# Altium PCB atmega+can.PcbDoc
Units mil, origin at the board's own origin, x right, y up, seen from the top; angles counter-clockwise.
Board outline 2700 x 3400 mil, 2 copper layers (Top Layer, Bottom Layer); 34 components, 37 nets, 143 pads, 15 vias.
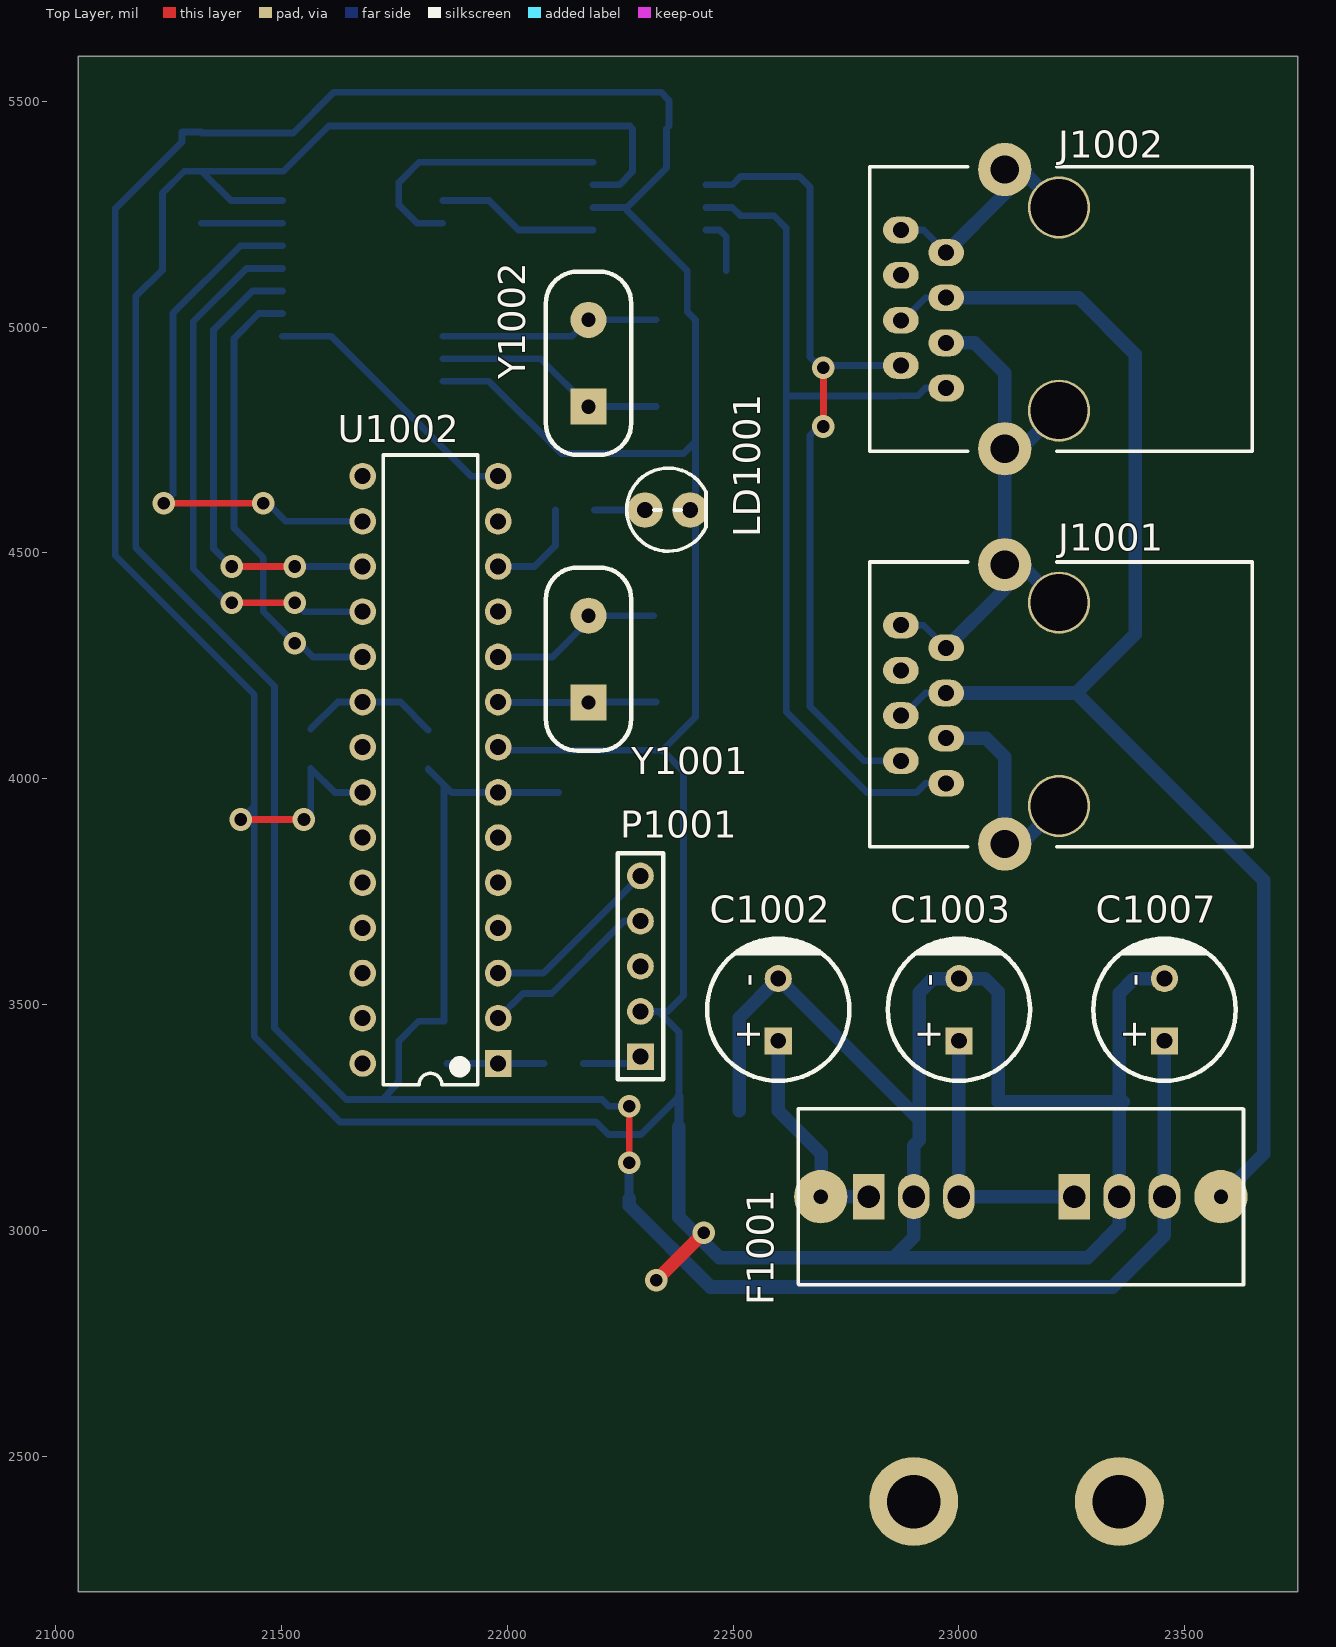
[diagram p0: Top Layer view]
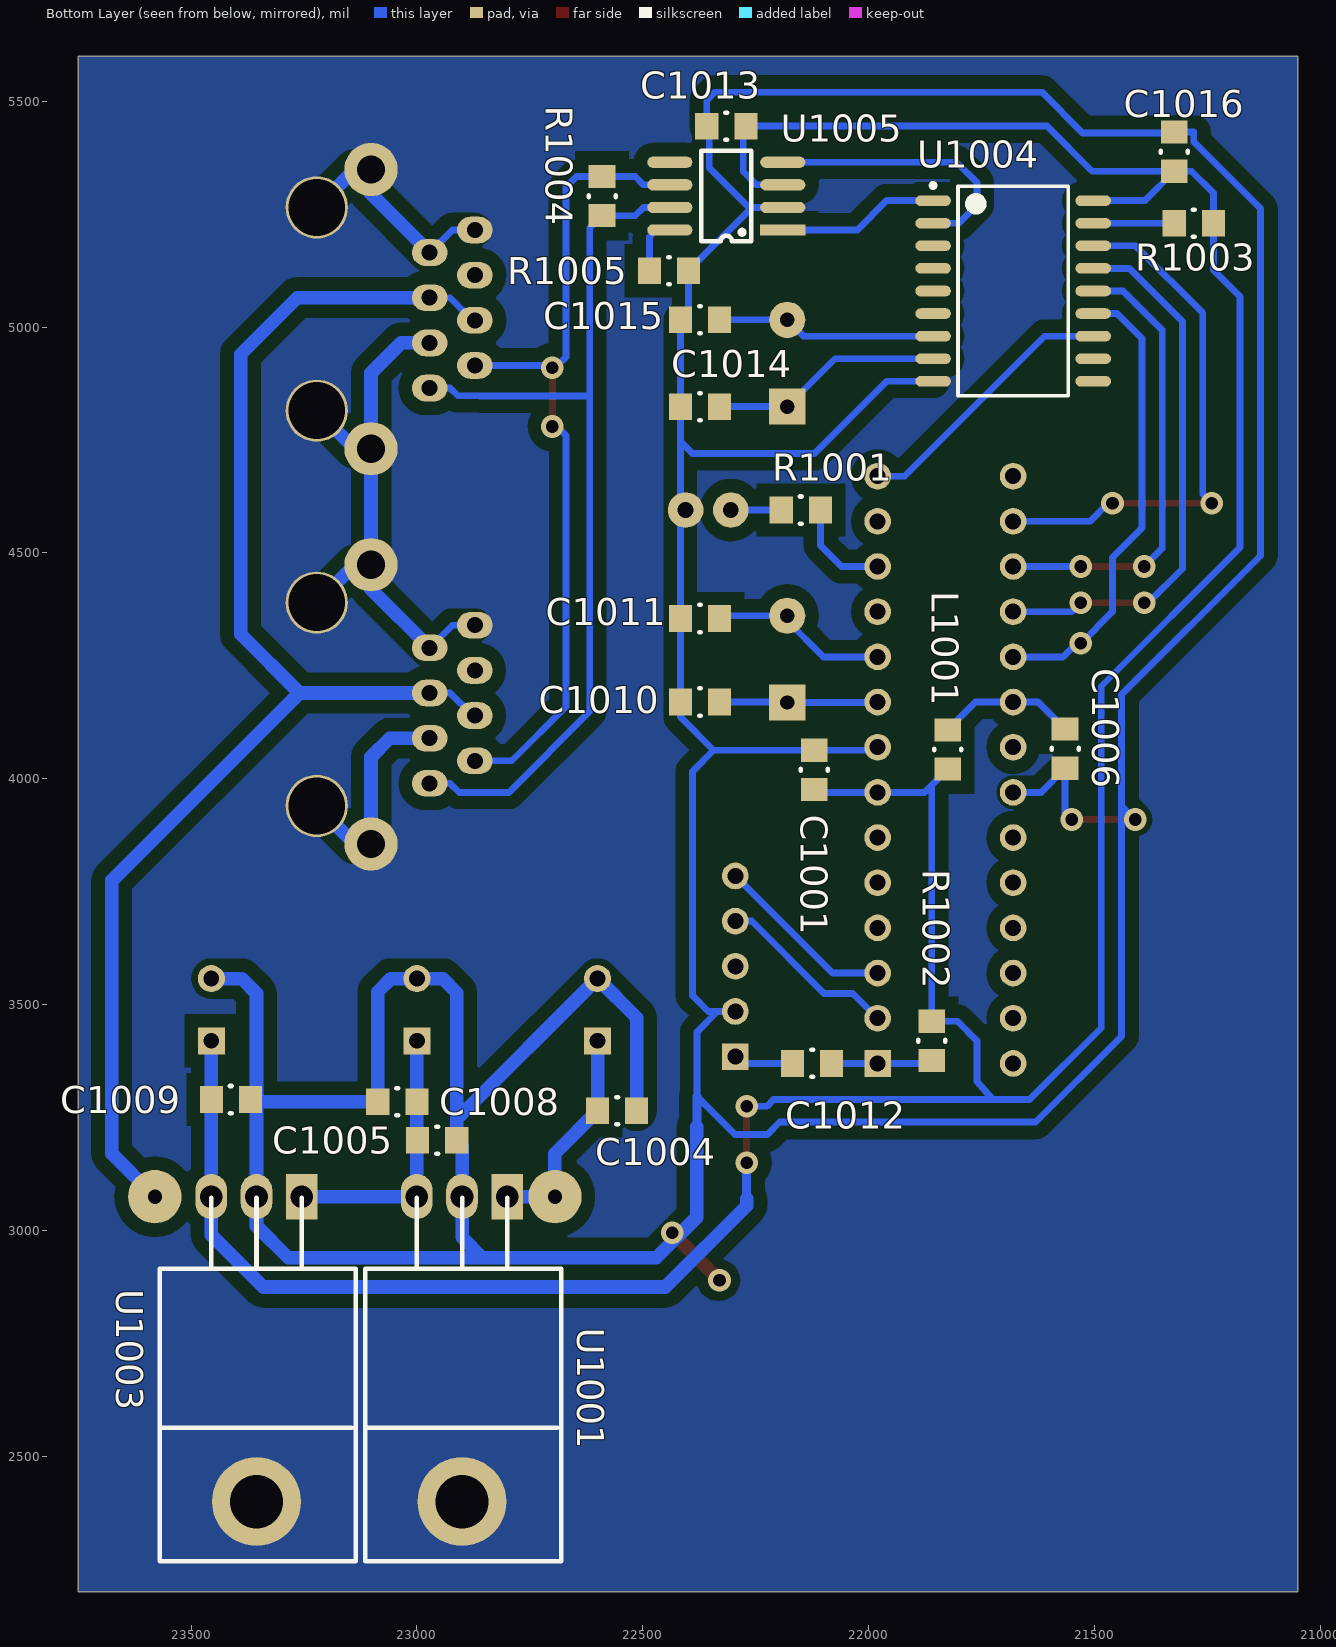
[diagram p1: Bottom Layer view, seen from below]
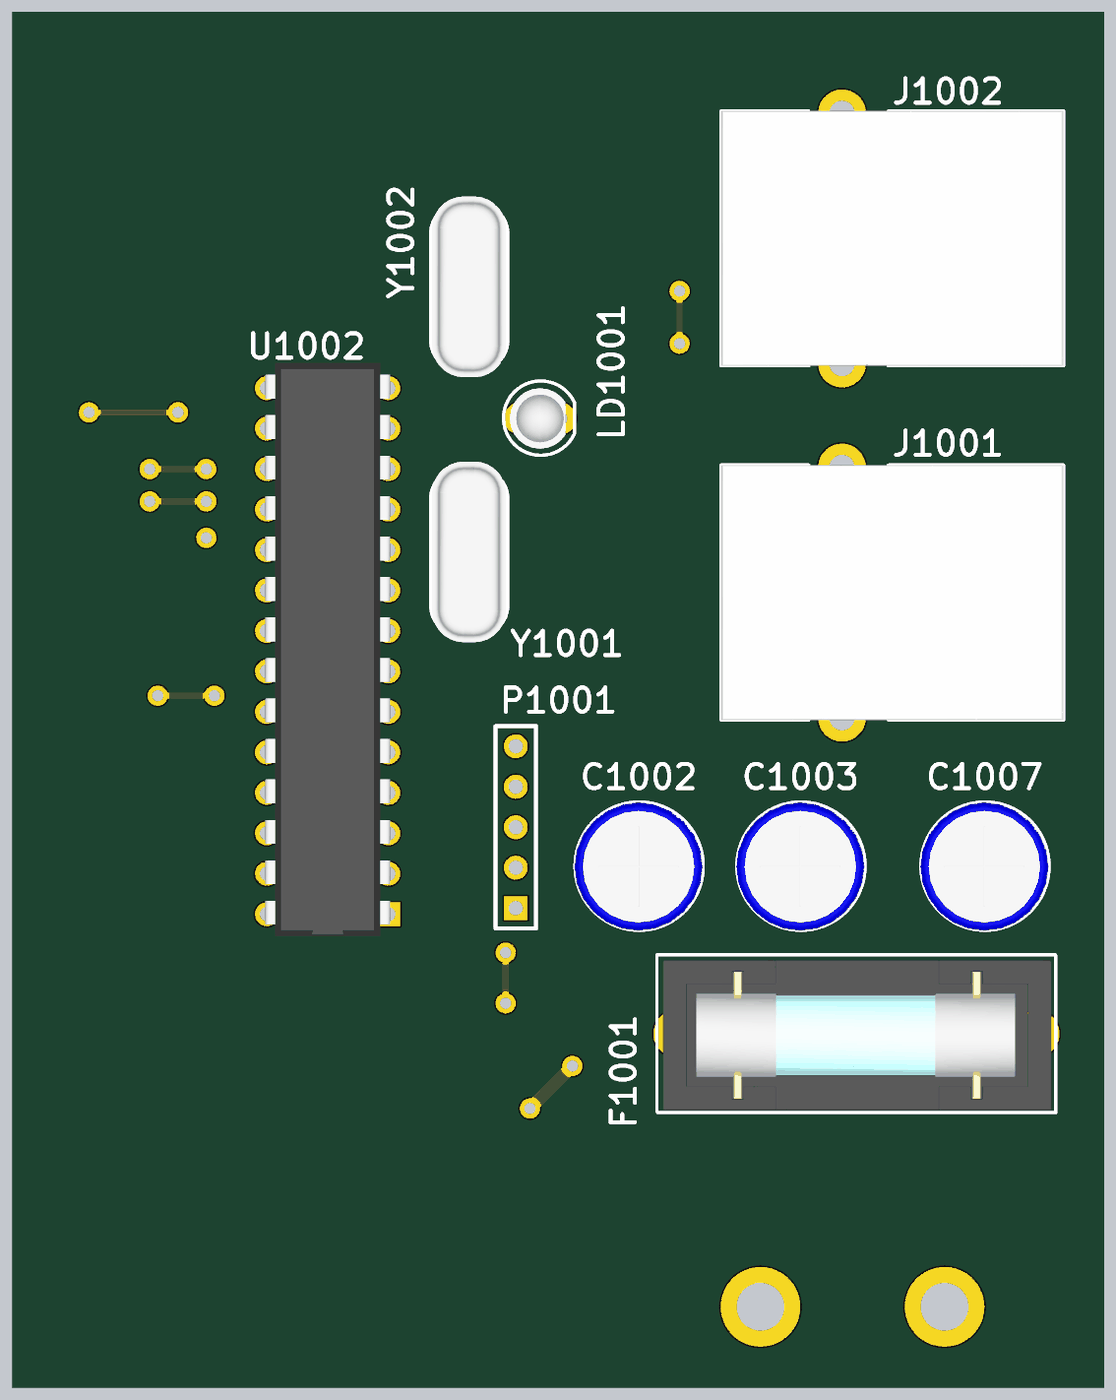
[diagram p2: 3D render of the assembled board from above, using the file's embedded part models]
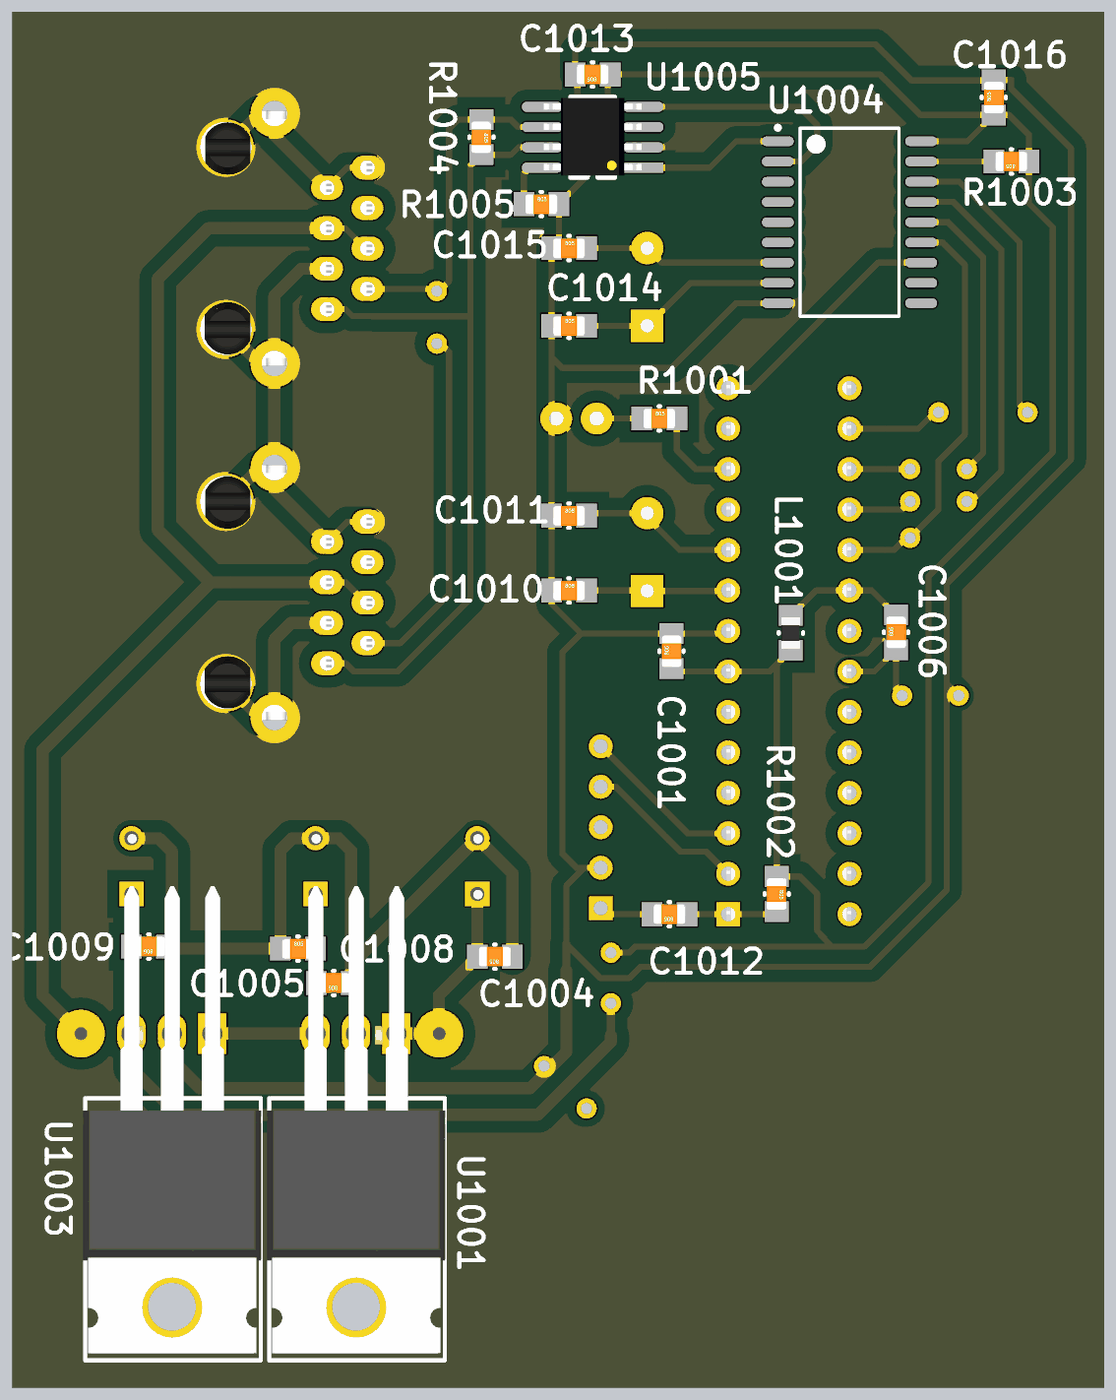
[diagram p3: 3D render of the assembled board from below, using the file's embedded part models]

## Layer stack, top to bottom
Top Layer: signal copper 1.4
Dielectric: dielectric 12.6, FR-4, Dk 4.8
Bottom Layer: signal copper 1.4

## Board outline
21050,5600 21050,2200 23750,2200 23750,5600

## Design rules (kind name [scope] priority, off if disabled: settings)
Clearance [All] p1: gap=30
PlaneClearance [All] p1: clearance=30
PlaneConnect [All] p1: planeconnectstyle=Relief reliefexpansion=20 reliefentries=4 reliefconductorwidth=30 reliefairgap=10
PolygonConnect [All] p1: connectstyle=Direct reliefconductorwidth=30 reliefentries=4 polygonreliefangle="90 Angle"
RoomDefinition atmega+can [InComponentClass('atmega+can')] p1: confinementstyle=ConfineIn formatcopy=TRUE lockcomponents=FALSE outline 21050,2200 23750,2200 23750,5600 21050,5600
RoutingVias [All] p1: holewidth=27.56 width=59.06 viastyle="Through Hole" minholewidth=27.56 minwidth=50 maxholewidth=39.37 maxwidth=59.06
SilkscreenOverComponentPads [All] p1: minsilkscreentomaskgap=10
SolderMaskExpansion [All] p1: expansion=4
Width [All] p1: maxlimit=30 minlimit=15 preferedwidth=20
25 further rules are at their usual default settings.

## Components (designator, comment, footprint, x,y, rotation, side; value= is the part's Value field where it differs from the comment)
C1001 "100nF" 0805C 22120,4020 r90 bottom
C1002 "CapacitorPol" CP3.5mm-8.0mm 22600,3420 r270 top
C1003 "CapacitorPol" CP3.5mm-8.0mm 23000,3420 r270 top
C1004 "100nF" 0805C 22556.69,3265 r0 bottom
C1005 "100nF" 0805C 22955,3200 r0 bottom
C1006 "100nF" 0805C 21565,4066.69 r90 bottom
C1007 "CapacitorPol" CP3.5mm-8.0mm 23455,3420 r270 top
C1008 "100nF" 0805C 23043.31,3285 r180 bottom
C1009 "100nF" 0805C 23411.69,3290 r0 bottom
C1010 "22pF" 0805C 22373.31,4170 r180 bottom
C1011 "22pF" 0805C 22373.31,4355 r180 bottom
C1012 "100nF" 0805C 22125,3370 r0 bottom
C1013 "100nF" 0805C 22315,5445 r0 bottom
C1014 "22pF" 0805C 22373.31,4823.94 r180 bottom
C1015 "22pF" 0805C 22373.31,5016.06 r180 bottom
C1016 "100nF" 0805C 21323.31,5388.31 r90 bottom
F1001 "250mA" "Porta Fusivel" 22694.17,3075 r0 top
J1001 "RJ45 (canbus)" "ASSMANN A-2004-2-4-LP/FS" 23220,4165 r90 top
J1002 "RJ45 (canbus)" "ASSMANN A-2004-2-4-LP/FS" 23220,5040 r90 top
L1001 "?H" 0805I 21825,4065 r270 bottom
LD1001 "GREEN" LED3MM 22305,4595 r0 top
P1001 "USART" HDR1X5 22295,3385 r90 top
R1001 "470" 0805C 22150,4595 r180 bottom
R1002 "10k" 0805C 21860,3420 r270 bottom
R1003 "10k" 0805C 21280,5230 r0 bottom
R1004 "120" 0805C 22590,5290 r270 bottom
R1005 "10k" 0805C 22441.69,5125 r180 bottom
U1001 "LM7812" TO220_DEITADO 22900,2917.52 r0 bottom
U1002 "ATmega328P" DIP28-300(100) 21980,3370 r90 top
U1003 "LM7805" TO220_DEITADO 23355,2917.52 r0 bottom
U1004 "MCP2515-E/SO" WSO18_L 21680,5080 r180 bottom
U1005 "MCP2551-I/SN" SOIC08-150(50) 22190,5215 r90 bottom
Y1001 "16MHz" HC49-US-THT 22180,4265 r90 top
Y1002 "16MHz" HC49-US-THT 22180,4920 r90 top

## Footprints (in the part's own frame and the unit in brackets; to place one, negate y for a bottom-side part, rotate by r counter-clockwise, add the part's x,y. Pads: shape width x height; smd on the part's side, far side on the other; paste and mask are expansions set on the pad)
0805C [mm] "Chip Capacitor; Body 2 x 1.3 mm (LxW typ)"
  rect 1.3x1.5 smd: 1(-1.1,0) 2(1.1,0)
  silkscreen extent -0.05,-0.76 0.05,0.76, body extent -1,-0.64 1,0.62, height 0.78
0805I [mm] "Chip Inductor; Body 2 x 1.3 mm (LxW typ)"
  rect 1.3x1.5 smd: 1(-1.1,0) 2(1.1,0)
  silkscreen extent -0.05,-0.76 0.05,0.76, body extent -1,-0.61 1,0.59, height 0.95
"ASSMANN A-2004-2-4-LP/FS" [mm]
  oval 1.5x2 hole 0.9: 1(-4.445,6.31) 2(-3.175,8.85) 3(-1.905,6.31) 4(-0.635,8.85) 5(0.635,6.31) 6(1.905,8.85) 7(3.175,6.31) 8(4.445,8.85)
  round 3 hole 1.6: S(-7.855,3.01) S(7.845,3.01)
  round 3.5 hole 3.2: S(-5.715,-0.04) S(5.715,-0.04)
  silkscreen extent -8,-10.9 8,10.6, body extent -8,-10.9 8,10.6, height 13.6
CP3.5mm-8.0mm [mil] "Capacitor, Electrolytic, Radial; Body 8 x 10.5 mm (Dia.xH typ); Pin Spacing 3.5 mm (typ)"
  rect 60x60 hole 35: 1(0,0)
  round 60 hole 35: 2(-137.8,0)
  silkscreen extent -226,-157 89,157, body extent -226,-160 91,157, height 468
DIP28-300(100) [mm] "DIP, 28-Leads, Row Spacing 7.62mm, Pitch 2.54mm, Body 34.67x7.3mm"
  rect 1.5x1.5 hole 0.9: 1(0,0)
  round 1.5 hole 0.9: 2(2.54,0) 3(5.08,0) 4(7.62,0) 5(10.16,0) 6(12.7,0) 7(15.24,0) 8(17.78,0) 9(20.32,0) 10(22.86,0) 11(25.4,0) 12(27.94,0) 13(30.48,0) 14(33.02,0) 15(33.02,7.62) 16(30.48,7.62) 17(27.94,7.62) 18(25.4,7.62) 19(22.86,7.62) 20(20.32,7.62) 21(17.78,7.62) 22(15.24,7.62) 23(12.7,7.62) 24(10.16,7.62) 25(7.62,7.62) 26(5.08,7.62) 27(2.54,7.62) 28(0,7.62)
  silkscreen extent -1.19,1.16 34.21,6.46, body extent -1.4,-0.13 34.6,7.74, height 5.08
HC49-US-THT [mil] "THT Quartz Crystal"
  rect 80x80 hole 32: 1(-96.06,0)
  round 80 hole 32: 2(96.06,0)
  silkscreen extent -203,-94 203,94, body extent -223,-91 224,92, height 138
HDR1X5 [mm] "Connector; Header; 5 Position"
  rect 1.5x1.5 hole 0.9: 1(0,0)
  round 1.5 hole 0.9: 2(2.54,0) 3(5.08,0) 4(7.62,0) 5(10.16,0)
  silkscreen extent -1.27,-1.27 11.43,1.27
LED3MM [mm]
  round 2 hole 0.889: 1(0,0) 2(2.54,0)
  silkscreen extent -1.03,-2.31 3.43,2.36, body extent -0.63,-1.9 2.87,1.9, height 5.5
"Porta Fusivel" [mm]
  round 3 hole 0.8: 1(0,0) 2(22.5,0)
  silkscreen extent -1.27,-4.95 23.77,4.95, body extent -0.9,-4.8 23.5,4.6, height 12.6
SOIC08-150(50) [mil] "SOIC; 8 Leads; Row Spacing 3.81 mm; Pitch 1.27 mm; 3D Antonio Fagaldo"
  rect 25x100 smd: 1(0,0)
  oval 25x100 smd: 2(50,0) 3(100,0) 4(150,0) 5(150,250) 6(100,250) 7(50,250) 8(0,250)
  silkscreen extent -25,70 175,180, body extent -20,4 173,246, height 69
TO220_DEITADO [mil]
  rect 70x100 hole 50: 1(-100,-157.48)
  oval 70x100 hole 50: 2(0,-157.48) 3(100,-157.48)
  silkscreen extent -220,-155 214,650, body extent -221,-522 220,632, height 185
WSO18_L [mm] "18-Pin Small Outline Integrated Circuit 1.27 mm Pitch, IPC High Density"
  oval 2x0.6 smd: 1(-4.5,5.08) 2(-4.5,3.81) 3(-4.5,2.54) 4(-4.5,1.27) 5(-4.5,0) 6(-4.5,-1.27) 7(-4.5,-2.54) 8(-4.5,-3.81) 9(-4.5,-5.08) 10(4.5,-5.08) 11(4.5,-3.81) 12(4.5,-2.54) 13(4.5,-1.27) 14(4.5,0) 15(4.5,1.27) 16(4.5,2.54) 17(4.5,3.81) 18(4.5,5.08)
  silkscreen extent -4.62,-5.9 3.1,6.05, body extent -3.8,-5.95 3.8,5.95, height 2.65

## Part data
C1001 C1004 C1005 C1006 C1008 C1009 C1010 C1011 C1012 C1013 C1014 C1015 C1016: library part Cap_0805, "Capacitor"
C1002 C1003 C1007: "Solid Aluminum Capacitor with Organic Semiconductor Electrolyte: 100uF, 10V, Bulk Pack"
F1001: library part "Fuse 1", "Fuse"
J1001 J1002: library part "Modular Jack with Shield", "YH-59-01"
L1001: library part Ind_0805, "Inductor"
LD1001: library part LED_0805, "LED"
P1001: library part "Header 5", "Header, 5-Pin"
R1001 R1002 R1003 R1004 R1005: library part Res_0805, "Resistor"
U1001 U1003: library part µA7805CKC, "Positive-Voltage Regulator"
U1002: "8-bit AVR Microcontroller, 32KB Flash, 1KB EEPROM, 2KB SRAM, 28-pin PDIP, Industrial Grade (-40°C to 85°C)"
U1004: library part CMP-0186-00035-2, "Stand-Alone CAN Controller With SPI Interface, 18-Pin SOIC, Extended Temperature"
U1005: library part CMP-1721-00003-1, "High-Speed CAN Transceiver, / 1 Mb/s, 4.5 to 5.5 V, 8-Pin SOIC (SN), Industrial Temperature, RoHS, Tube"
Y1001 Y1002: library part Crystal, "Crystal"

## Free pads (board coordinates)
  round 196.85 hole 118.11: 0(22900,2400) 0(23355,2400)

## Via types
v1: diameter 50, hole 28, Top Layer to Bottom Layer, 15 vias

## Nets (pads, with @x,y where several pads share a name; then routed paths per layer and width w, separated by ;. In a path a pad name is that pad's centre, name@x,y a point inside that pad or via, vN(x,y) a via of type N, cw(c..) or ccw(c..) an arc to the next point about the centre after c; other vN are vias at no path point)
+5V: C1001.1 C1007.1 C1009.2 C1013.1 C1016.1 L1001.2 R1002.1 R1003.1 U1002.7 U1003.3 U1004.18 U1005.3 | length 7405.7
  Top Layer w15: v1(22270,3150) v1(22270,3275)
  Bottom Layer w15: U1004.18 21388.31,5280 C1016.1 ; L1001.2 21860,3986.69 ; C1001.1@22113.31,3970 U1002.7 21876.69,3970 21860,3986.69 ; U1005.3 22248.21,5315 22277.5,5344.29 C1013.1@22277.5,5439.19 ; v1(22270,3275) 22225.25,3275 22210.25,3290 21725,3290 ; C1013.1 21605,5445 21505,5345 C1016.1 ; C1016.1 21285,5345 21236.69,5296.69 R1003.1 21236.69,5126.69 21177.5,5067.5 21177.5,4512.5 21485,4205 21485,3448.64 21643.64,3290 21725,3290 ; 21725,3290 21760,3330 21760,3420 21803.31,3463.31 R1002.1 21860,3986.69
  Bottom Layer w20: 22270,3070 v1(22270,3150)
  Bottom Layer w30: 22270,3070 22270,3055 22450,2875 23340,2875 23455,2990 U1003.3 C1009.2 C1007.1
+5V_ADC: C1006.2 L1001.1 U1002.20 | length 310.4
  Bottom Layer w15: C1006.2 21625,4170 U1002.20 21763.31,4170 L1001.1
+12V: C1003.1 C1005.2 C1008.2 U1001.3 U1003.1 | length 600
  Bottom Layer w30: C1003.1 C1008.2 U1001.3 U1003.1
+18V: C1002.1 C1004.2 F1001.1 U1001.1 | length 489.4
  Bottom Layer w30: C1002.1 C1004.2 22695,3170 22695,3075 U1001.1
+18V_PRE: F1001.2 J1001.4 J1001.5 J1002.4 J1002.5 | length 3130.1
  Bottom Layer w15: J1001.4 22876.21,4140 22926.21,4190 J1001.5 ; J1002.4 22876.21,5015 22926.21,5065 J1002.5
  Bottom Layer w30: J1001.5 23260,4190 ; J1002.5 23265,5065 23390,4940 23390,4320 23260,4190 ; F1001.2 23675,3170 23675,3775 23260,4190
CAN_GND: C1001.2 C1002.2 C1003.2 C1004.1 C1005.1 C1006.1 C1007.2 C1008.1 C1009.1 C1010.1 C1011.1 C1013.2 C1014.1 C1015.1 C1016.2 J1001.3 J1001.7 J1001.8 J1001.S J1002.3 J1002.7 J1002.8 J1002.S LD1001.2 P1001.2 pad.0 R1005.2 U1001.2 U1002.8 U1002.22 U1003.2 U1004.9 U1005.2 | length 14784.5
  Top Layer w15: v1(21410,3910) v1(21550,3910)
  Top Layer w30: v1(22330,2890) v1(22435,2995)
  Bottom Layer w15: C1016.2@21323.31,5430 21526.36,5430 21616.36,5520 22340,5520 22358.31,5501.69 C1013.2 ; C1016.2 21280,5431.61 21280,5409.84 21132.5,5262.34 21132.5,4493.86 21440,4186.36 21440,3940 ; v1(21410,3910) 21440,3940 ; v1(21550,3910) 21565,3925 C1006.1 21618.39,3970 U1002.22 ; U1004.9 21960,4880 22120,4720 22390,4720 22416.61,4746.61 ; U1002.8 21986.69,4063.31 C1001.2 22343.31,4063.31 ; U1005.2 22265,5265 ; P1001.2 22335,3485 ; C1013.2@22352.5,5439.19 22352.5,5352.5 22265,5265 ; J1001.8 22921.57,4340 J1001.7 ; J1002.8 22921.57,5215 J1002.7 ; 21440,3940 21440,3430 21630,3240 22196.61,3240 22224.11,3212.5 22295.89,3212.5 22380,3296.61 22380,3440 22335,3485 ; 22265,5265 22265,5258.39 R1005.2 22398.39,5034.29 C1015.1 C1014.1 22416.61,4746.61 ; 22335,3485 22355,3485 22390,3520 22390,4016.61 22343.31,4063.31 ; 22343.31,4063.31 22416.61,4136.61 C1010.1 C1011.1 22416.61,4746.61
  Bottom Layer w20: 22380,3230 22380,3296.61
  Bottom Layer w30: v1(22330,2890) v1@22335,2890 ; 22380,3230 22380,3029.85 22469.85,2940 22855,2940 ; C1004.1 22513.39,3471.18 C1002.2 22911.69,3246.1 ; J1001.3 23060,4090 23101.5,4048.5 23101.5,3855.75 23137.32,3855.75 J1001.S@23221.57,3940 ; J1001.7 23101.5,4419.92 J1001.S@23101.5,4473.86 ; J1002.3 23035,4965 23101.5,4898.5 J1002.S@23101.5,4730.75 ; J1002.7 23101.5,5294.92 23101.5,5348.86 23137.72,5348.86 J1002.S@23221.57,5265 ; J1001.S@23221.57,4390 23137.72,4473.86 J1001.S@23101.5,4473.86 ; J1002.S@23221.57,4815 23137.32,4730.75 J1002.S@23101.5,4730.75 ; C1009.1@23363.39,3285 C1009.1@23355,3285 ; C1007.2 23387.8,3557.8 23355,3525 C1009.1@23355,3285 ; 22855,2940 23285,2940 23355,3010 U1003.2 C1009.1@23355,3285 ; 22855,2940 22900,2985 U1001.2 22900,3188.31 C1005.1 22911.69,3246.1 ; 22911.69,3246.1 22911.69,3526.69 22942.8,3557.8 C1003.2 23057.2,3557.8 23086.61,3528.39 C1008.1 C1009.1@23355,3285 ; J1001.S@23101.5,4473.86 J1002.S@23101.5,4730.75
CAN_H: J1001.1 J1002.1 R1004.2 U1005.7 | length 2089.7
  Bottom Layer w15: U1005.7 22498.21,5265 22516.52,5246.69 R1004.2 22617.5,5219.19 22617.5,4148.86 22796.36,3970 22906.21,3970 22926.21,3990 J1001.1 J1001.1@22951.57,3970 ; 22620,4847.5 22860,4847.5 ; 22860.47,4847.97 22909.18,4847.97 22926.21,4865 J1002.1
CAN_L: J1001.2 J1002.2 R1004.1 U1005.6 | length 1822
  Top Layer w15: v1(22700,4780) v1(22700,4910)
  Bottom Layer w15: U1005.6 22498.21,5315 22516.52,5333.31 R1004.1 22646.69,5333.31 22670,5310 22670,4933.64 22678.64,4925 ; v1(22700,4780) 22690,4780 22670,4760 22670,4160 22790,4040 J1001.2 ; v1@22705,4915 J1002.2
LED: R1001.2 U1002.12 | length 224.3
  Bottom Layer w15: U1002.12 22060,4470 22106.69,4516.69 R1001.2
MCP2515_INT: U1002.14 U1004.12 | length 605.6
  Bottom Layer w15: U1004.12 21610,4980 21920,4670 U1002.14
MCP2515_MISO: U1002.18 U1004.15 | length 1208.2
  Top Layer w15: v1(21390,4390) v1(21530,4390)
  Bottom Layer w15: v1(21390,4390) 21380,4390 21305,4465 21305,5012.28 21422.72,5130 U1004.15 ; v1(21530,4390) 21550,4370 U1002.18
MCP2515_MOSI: U1002.17 U1004.14 | length 1028.8
  Top Layer w15: v1@21380,4470 v1(21530,4470)
  Bottom Layer w15: v1(21390,4470) 21350,4510 21350,4993.64 21436.36,5080 U1004.14 ; v1(21530,4470) U1002.17
MCP2515_SCK: U1002.19 U1004.13 | length 1024
  Bottom Layer w15: U1004.13 21450,5030 21395,4975 21395,4555 21460,4490 21460,4370 v1(21530,4300) 21540,4290 21550,4290 21570,4270 U1002.19
MCP2515_SS: U1002.16 U1004.16 | length 1190.4
  Top Layer w15: v1(21240,4610) v1(21460,4610)
  Bottom Layer w15: v1(21240,4610) 21260,4630 21260,5030.92 21409.08,5180 U1004.16 ; v1(21460,4610) 21470,4610 21510,4570 21540,4570 U1002.16
NetC1012_1: C1012.1 R1002.2 U1002.1 | length 215
  Bottom Layer w15: R1002.2@21866.69,3370 U1002.1 C1012.1
NetC1014_2: C1014.2 U1004.8 Y1002.1 | length 516.8
  Bottom Layer w15: U1004.8 22073.94,4930 Y1002.1 C1014.2
NetC1015_2: C1015.2 U1004.7 Y1002.2 | length 487.8
  Bottom Layer w15: U1004.7 22143.94,4980 Y1002.2 C1015.2
NetLD1001_1: LD1001.1 R1001.1 | length 111.7
  Bottom Layer w15: R1001.1 LD1001.1
NetR1003_2: R1003.2 U1004.17 | length 179.5
  Bottom Layer w15: R1003.2 U1004.17
NetR1005_1: R1005.1 U1005.8 | length 126.2
  Bottom Layer w15: U1005.8 22470,5215 22485,5200 R1005.1
NetU1002_4: U1002.4
NetU1002_5: U1002.5
NetU1002_6: U1002.6
NetU1002_11: U1002.11
NetU1002_13: U1002.13
NetU1002_23: U1002.23
NetU1002_24: U1002.24
NetU1002_25: U1002.25
NetU1002_26: U1002.26
NetU1002_27: U1002.27
RXCAN: U1004.2 U1005.4 | length 612.4
  Bottom Layer w15: U1004.2 21800,5230 21760,5270 21760,5320 21805,5365 U1005.4
TXCAN: U1004.1 U1005.1 | length 359.8
  Bottom Layer w15: U1004.1 21960,5280 22025,5215 U1005.1
USART_RTS: C1012.2 P1001.1 | length 132.9
  Bottom Layer w15: C1012.2 22280,3370 P1001.1
USART_RX: P1001.4 U1002.2 | length 404.1
  Bottom Layer w15: U1002.2 22035,3525 22098.64,3525 22258.64,3685 P1001.4
USART_TX: P1001.5 U1002.3 | length 404.1
  Bottom Layer w15: U1002.3 22080,3570 P1001.5
XTAL1: C1010.2 U1002.9 Y1001.1 | length 347.9
  Bottom Layer w15: U1002.9@21981.06,4168.94 Y1001.1 ; Y1001.1@22181.06,4170 C1010.2
XTAL2: C1011.2 U1002.10 Y1001.2 | length 377.1
  Bottom Layer w15: U1002.10 22100,4270 Y1001.2@22180,4350 ; Y1001.2 C1011.2@22323.94,4361.06
pads on no net: J1001.6 J1002.6 P1001.3 U1002.15 U1002.21 U1002.28 U1004.3 U1004.4 U1004.5 U1004.6 U1004.10 U1004.11 U1005.5

## Polygon pours and split planes (outlines as drawn)
CAN_GND on Bottom Layer "Bottom Layer-No Net" (solid, remove dead copper): 21050,5600 21050,2200 23750,2200 23750,5600

## Text inside footprints (layer, text, board x,y; h text height)
C1002: Top Overlay "-" at 22560,3540 h59.06 r90; Top Overlay "+" at 22560,3400 h59.06 r90
C1003: Top Overlay "-" at 22960,3540 h59.06 r90; Top Overlay "+" at 22960,3400 h59.06 r90
C1007: Top Overlay "-" at 23415,3540 h59.06 r90; Top Overlay "+" at 23415,3400 h59.06 r90